# Altium PCB PCB_DMEM_Mezzanine.PcbDoc (part 4 of 4)
Units mil, origin at the board's own origin, x right, y up, seen from the top; angles counter-clockwise.
Board outline 2250 x 3200 mil, 6 copper layers (Top Layer - Signal, AGND-L1, Int. Signal, Power-GND, AGND-D.Sig., Bottom Layer - Signal), stack 32.112 mil thick; 443 components, 241 nets, 1099 pads, 545 vias.
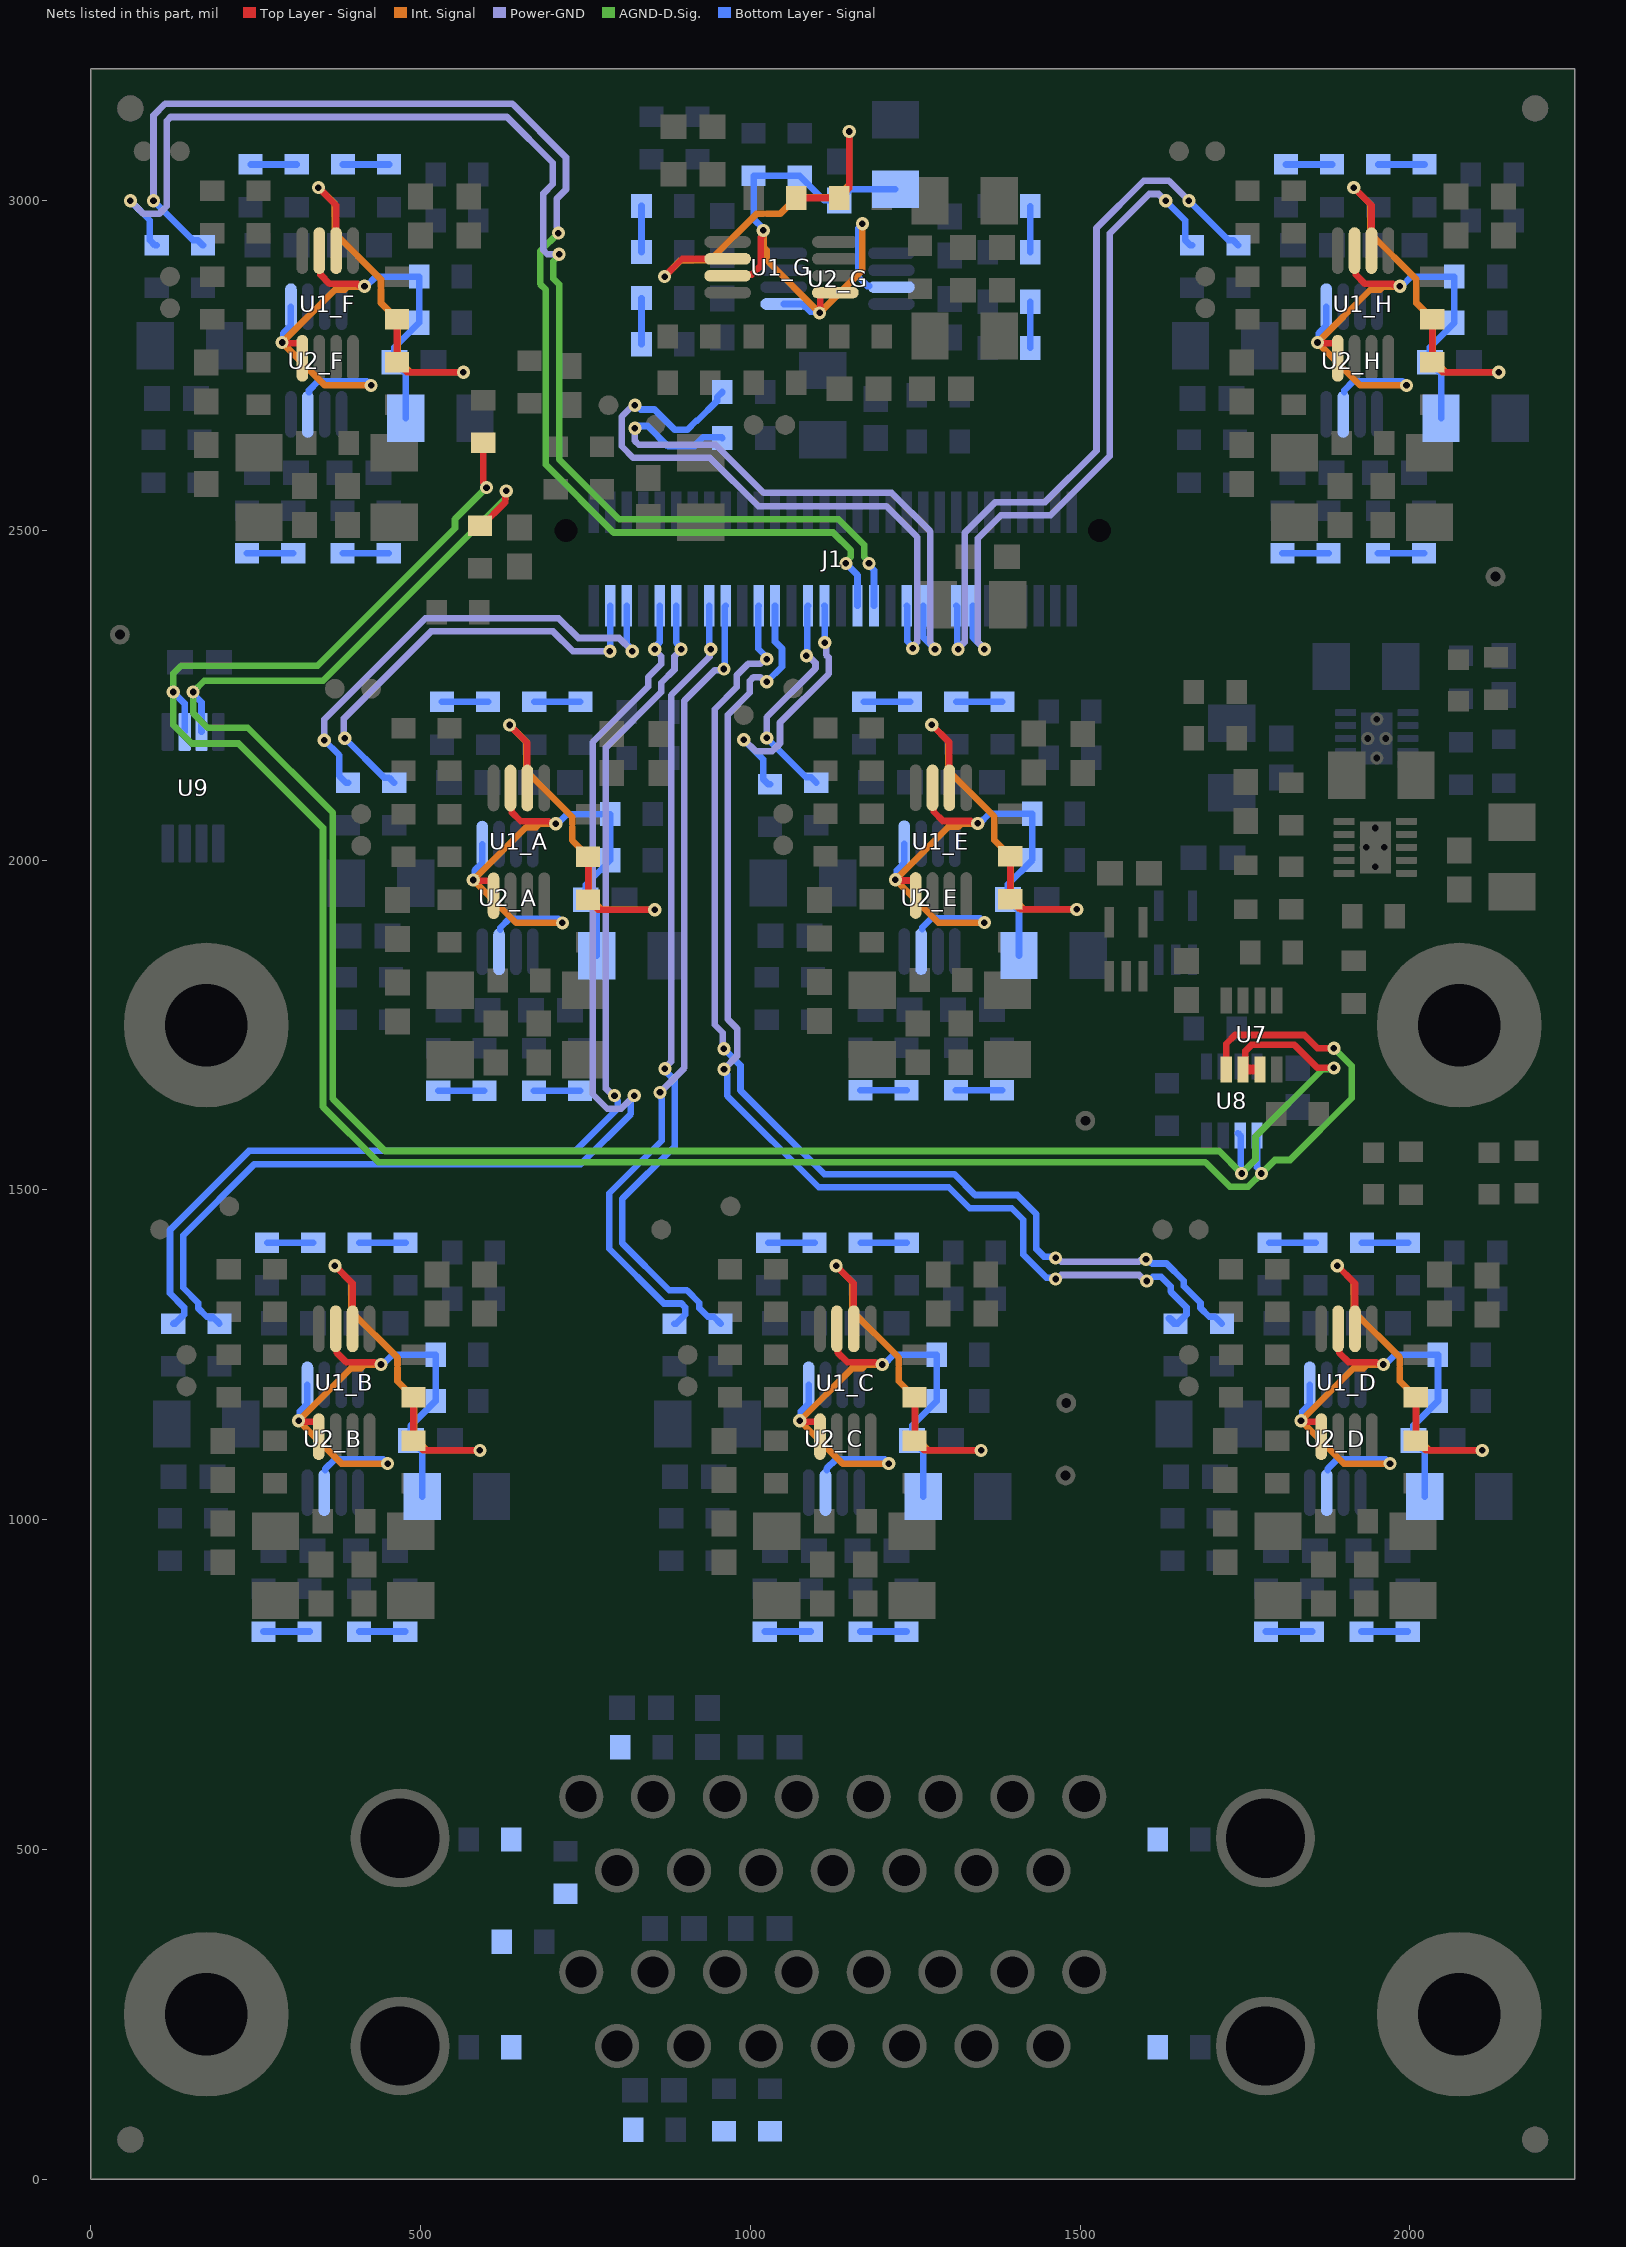
[diagram p8: the nets of this part, all layers, seen from the top]

## Via types
v1: diameter 20, hole 10, Top Layer - Signal to Bottom Layer - Signal, 545 vias

## Nets (pads, with @x,y where several pads share a name; then routed paths per layer and width w, separated by ;. In a path a pad name is that pad's centre, name@x,y a point inside that pad or via, vN(x,y) a via of type N, cw(c..) or ccw(c..) an arc to the next point about the centre after c; other vN are vias at no path point) (continued)
NetR11_A_2: R11_A.2 R14_A.1 U1_A.2 | length 692.1
  Top Layer - Signal w10: v1(635,2205) 661.89,2178.11 U1_A.2@661.89,2109.41 ; R14_A.1@754.09,2005.43 R11_A.2@754.09,1940 769.09,1925 v1(855,1925)
  Int. Signal w10: v1(635,2205) 660,2180 660,2135.71 730,2065.71 730,2055.18 ; 730,2050 730,2030 755,2005 755,1945 775,1925 v1(855,1925)
NetR11_B_2: R11_B.2 R14_B.1 U1_B.2 | length 692.1
  Top Layer - Signal w10: v1(370,1385) 396.89,1358.11 U1_B.2@396.89,1289.41 ; R14_B.1@489.09,1185.43 R11_B.2@489.09,1120 504.09,1105 v1(590,1105)
  Int. Signal w10: v1(370,1385) 395,1360 395,1315.71 465,1245.71 465,1235.18 ; 465,1230 465,1210 490,1185 490,1125 510,1105 v1(590,1105)
NetR11_C_2: R11_C.2 R14_C.1 U1_C.2 | length 692.1
  Top Layer - Signal w10: v1(1130,1385) 1156.89,1358.11 U1_C.2@1156.89,1289.41 ; R14_C.1@1249.09,1185.43 R11_C.2@1249.09,1120 1264.09,1105 v1(1350,1105)
  Int. Signal w10: v1(1130,1385) 1155,1360 1155,1315.71 1225,1245.71 1225,1235.18 ; 1225,1230 1225,1210 1250,1185 1250,1125 1270,1105 v1(1350,1105)
NetR11_D_2: R11_D.2 R14_D.1 U1_D.2 | length 692.1
  Top Layer - Signal w10: v1(1890,1385) 1916.89,1358.11 U1_D.2@1916.89,1289.41 ; R14_D.1@2009.09,1185.43 R11_D.2@2009.09,1120 2024.09,1105 v1(2110,1105)
  Int. Signal w10: v1(1890,1385) 1915,1360 1915,1315.71 1985,1245.71 1985,1235.18 ; 1985,1230 1985,1210 2010,1185 2010,1125 2030,1105 v1(2110,1105)
NetR11_E_2: R11_E.2 R14_E.1 U1_E.2 | length 697.3
  Top Layer - Signal w10: v1(1275,2205.47) 1301.89,2178.58 U1_E.2@1301.89,2109.88 ; R14_E.1@1394.09,2005.91 R11_E.2@1394.09,1940.47 1409.09,1925.47 v1(1495,1925.47)
  Int. Signal w10: v1(1275,2205.47) 1300,2180.47 1300,2136.18 1370,2066.18 1370,2030.47 1395,2005.47 1395,1945.47 1415,1925.47 v1(1495,1925.47)
NetR11_F_2: R11_F.2 R14_F.1 U1_F.2 | length 692.1
  Top Layer - Signal w10: v1(345,3020) 371.89,2993.11 U1_F.2@371.89,2924.41 ; R14_F.1@464.09,2820.43 R11_F.2@464.09,2755 479.09,2740 v1(565,2740)
  Int. Signal w10: v1(345,3020) 370,2995 370,2950.71 440,2880.71 440,2870.18 ; 440,2865 440,2845 465,2820 465,2760 485,2740 v1(565,2740)
NetR11_G_2: R11_G.2 R14_G.1 U1_G.2 | length 692.1
  Top Layer - Signal w10: v1(870,2885) 896.89,2911.89 U1_G.2@965.59,2911.89 ; R14_G.1@1069.57,3004.09 R11_G.2@1135,3004.09 1150,3019.09 v1(1150,3105)
  Int. Signal w10: v1(870,2885) 895,2910 939.29,2910 1009.29,2980 1019.82,2980 ; 1025,2980 1045,2980 1070,3005 1130,3005 1150,3025 v1(1150,3105)
NetR11_H_2: R11_H.2 R14_H.1 U1_H.2 | length 697.3
  Top Layer - Signal w10: v1(1915,3020) 1941.89,2993.11 U1_H.2@1941.89,2924.41 ; R14_H.1@2034.09,2820.43 R11_H.2@2034.09,2755 2049.09,2740 v1(2135,2740)
  Int. Signal w10: v1(1915,3020) 1940,2995 1940,2950.71 2010,2880.71 2010,2845 2035,2820 2035,2760 2055,2740 v1(2135,2740)
NetR17_A_2: R17_A.2 R18_A.1 | length 70
  Bottom Layer - Signal w10: R17_A.2@532.28,2240 R18_A.1@602.28,2240
NetR17_B_2: R17_B.2 R18_B.1 | length 70
  Bottom Layer - Signal w10: R17_B.2@267.28,1420 R18_B.1@337.28,1420
NetR17_C_2: R17_C.2 R18_C.1 | length 70
  Bottom Layer - Signal w10: R17_C.2@1027.28,1420 R18_C.1@1097.28,1420
NetR17_D_2: R17_D.2 R18_D.1 | length 70
  Bottom Layer - Signal w10: R17_D.2@1787.28,1420 R18_D.1@1857.28,1420
NetR17_E_2: R17_E.2 R18_E.1 | length 70
  Bottom Layer - Signal w10: R17_E.2@1172.28,2240.47 R18_E.1@1242.28,2240.47
NetR17_F_2: R17_F.2 R18_F.1 | length 70
  Bottom Layer - Signal w10: R17_F.2@242.28,3055 R18_F.1@312.28,3055
NetR17_G_2: R17_G.2 R18_G.1 | length 70
  Bottom Layer - Signal w10: R17_G.2@835,2782.28 R18_G.1@835,2852.28
NetR17_H_2: R17_H.2 R18_H.1 | length 70
  Bottom Layer - Signal w10: R17_H.2@1812.28,3055 R18_H.1@1882.28,3055
NetR19_A_2: R19_A.2 R20_A.1 | length 70
  Bottom Layer - Signal w10: R19_A.2@526.81,1650.43 R20_A.1@596.81,1650.43
NetR19_B_2: R19_B.2 R20_B.1 | length 70
  Bottom Layer - Signal w10: R19_B.2@261.81,830.43 R20_B.1@331.81,830.43
NetR19_C_2: R19_C.2 R20_C.1 | length 70
  Bottom Layer - Signal w10: R19_C.2@1021.81,830.43 R20_C.1@1091.81,830.43
NetR19_D_2: R19_D.2 R20_D.1 | length 70
  Bottom Layer - Signal w10: R19_D.2@1781.81,830.43 R20_D.1@1851.81,830.43
NetR19_E_2: R19_E.2 R20_E.1 | length 70
  Bottom Layer - Signal w10: R19_E.2@1166.81,1650.91 R20_E.1@1236.81,1650.91
NetR19_F_2: R19_F.2 R20_F.1 | length 70
  Bottom Layer - Signal w10: R19_F.2@236.81,2465.43 R20_F.1@306.81,2465.43
NetR19_G_2: R19_G.2 R20_G.1 | length 70
  Bottom Layer - Signal w10: R19_G.2@1424.57,2776.81 R20_G.1@1424.57,2846.81
NetR19_H_2: R19_H.2 R20_H.1 | length 70
  Bottom Layer - Signal w10: R19_H.2@1806.81,2465.43 R20_H.1@1876.81,2465.43
NetR21_A_2: R21_A.2 R22_A.1 | length 70
  Bottom Layer - Signal w10: R21_A.2@672.28,2240 R22_A.1@742.28,2240
NetR21_B_2: R21_B.2 R22_B.1 | length 70
  Bottom Layer - Signal w10: R21_B.2@407.28,1420 R22_B.1@477.28,1420
NetR21_C_2: R21_C.2 R22_C.1 | length 70
  Bottom Layer - Signal w10: R21_C.2@1167.28,1420 R22_C.1@1237.28,1420
NetR21_D_2: R21_D.2 R22_D.1 | length 70
  Bottom Layer - Signal w10: R21_D.2@1927.28,1420 R22_D.1@1997.28,1420
NetR21_E_2: R21_E.2 R22_E.1 | length 70
  Bottom Layer - Signal w10: R21_E.2@1312.28,2240.47 R22_E.1@1382.28,2240.47
NetR21_F_2: R21_F.2 R22_F.1 | length 70
  Bottom Layer - Signal w10: R21_F.2@382.28,3055 R22_F.1@452.28,3055
NetR21_G_2: R21_G.2 R22_G.1 | length 70
  Bottom Layer - Signal w10: R21_G.2@835,2922.28 R22_G.1@835,2992.28
NetR21_H_2: R21_H.2 R22_H.1 | length 70
  Bottom Layer - Signal w10: R21_H.2@1952.28,3055 R22_H.1@2022.28,3055
NetR23_A_2: R23_A.2 R24_A.1 | length 70
  Bottom Layer - Signal w10: R23_A.2@671.81,1650.43 R24_A.1@741.81,1650.43
NetR23_B_2: R23_B.2 R24_B.1 | length 70
  Bottom Layer - Signal w10: R23_B.2@406.81,830.43 R24_B.1@476.81,830.43
NetR23_C_2: R23_C.2 R24_C.1 | length 70
  Bottom Layer - Signal w10: R23_C.2@1166.81,830.43 R24_C.1@1236.81,830.43
NetR23_D_2: R23_D.2 R24_D.1 | length 70
  Bottom Layer - Signal w10: R23_D.2@1926.81,830.43 R24_D.1@1996.81,830.43
NetR23_E_2: R23_E.2 R24_E.1 | length 70
  Bottom Layer - Signal w10: R23_E.2@1311.81,1650.91 R24_E.1@1381.81,1650.91
NetR23_F_2: R23_F.2 R24_F.1 | length 70
  Bottom Layer - Signal w10: R23_F.2@381.81,2465.43 R24_F.1@451.81,2465.43
NetR23_G_2: R23_G.2 R24_G.1 | length 70
  Bottom Layer - Signal w10: R23_G.2@1424.57,2921.81 R24_G.1@1424.57,2991.81
NetR23_H_2: R23_H.2 R24_H.1 | length 70
  Bottom Layer - Signal w10: R23_H.2@1951.81,2465.43 R24_H.1@2021.81,2465.43
SCL: R54.1 U7.5 U8.5 U9.6 | length 3561.5
  Top Layer - Signal w10: R54.1@595,2632.72 595,2572.71 600,2567.71 v1(600,2565) ; U7.5@1720,1681.14 U7.5@1721.61,1682.75 1721.61,1721.61 1735,1735 1840,1735 1860,1715 v1(1885,1715)
  AGND-D.Sig. w10: v1(600,2565) 552.25,2517.25 552.25,2503.46 343.79,2295 136.86,2295 125,2283.14 v1(125,2255) 125,2205 153,2177 224,2177 352,2049 352,1626 436,1542 1690,1542 1727,1505 1755,1505 v1(1775,1525) 1795.44,1545.44 1818.44,1545.44 1912,1639 1912,1688 v1(1885,1715)
  Bottom Layer - Signal w10: v1(125,2255) 142.2,2237.8 U9.6@142.2,2194.65 ; U8.5@1768.39,1582.75 1768.39,1534.32 1775,1527.71 v1(1775,1525)
SDA: R48.1 U7.6 U7.7 U8.6 U9.7 | length 3407.4
  Top Layer - Signal w10: R48.1@590,2507.28 592.76,2507.28 628.09,2542.61 628.09,2558.09 v1(630,2560) ; U7.6@1747.2,1682.75 1750.7,1686.25 1750.7,1710.7 1760,1720 1825,1720 1860,1685 v1(1885,1685)
  Top Layer - Signal w15: U7.6@1747.2,1682.75 U7.7@1772.8,1682.75 U7.7@1773,1682.55
  AGND-D.Sig. w10: v1(630,2560) 628.09,2558.09 628.09,2548.09 352,2272 172,2272 v1(155,2255) 155,2223 177,2201 238,2201 367,2072 367,1638 446,1559 1711,1559 v1(1745,1525) 1766,1546 1766,1581 1868.09,1683.09 1883.09,1683.09 v1(1885,1685)
  Bottom Layer - Signal w10: v1(155,2255) 155,2252.29 167.8,2239.5 U9.7@167.8,2194.65 ; U8.6@1739.3,1586.25 U8.6@1742.8,1582.75 1743.9,1581.65 1743.9,1526.1 v1(1745,1525)
SHLD_GND: R29.2 R30.2 R31.2 R32.2 R33.2 R34.2 R37.1 R38.1 R39.1 R40.1
Vref_A: C5_A.2 C6_A.2 R1_A.1 R3_A.2 U1_A.3 U1_A.5 U2_A.3 U2_A.5 | length 977.2
  Top Layer - Signal w10: v1(580,1970) 581.2,1968.8 607.14,1968.8 610.71,1965.23 U1_A.5@610.71,1946.02 ; U1_A.3@636.3,2109.41 636.3,2102.85 638.03,2101.12 638.03,2072.95 652.01,2058.98 694.31,2058.98 696.02,2057.27 703.09,2057.27 v1(705,2055.35)
  Int. Signal w10: v1(705,2055.35) 704.65,2055 680,2055 675,2050 660,2050 v1(580,1970) 645,1905 v1(715,1905)
  Bottom Layer - Signal w10: v1(580,1970) 581.91,1971.91 581.91,1984.23 593.43,1995.75 U2_A.5@593.43,2024.41 ; U2_A.3@620.75,1894.79 620.75,1897.48 634.72,1911.46 708.54,1911.46 v1(715,1905) ; v1(705,2055.35) 707.71,2055.35 722.35,2070 R1_A.1@787.72,2070 R3_A.2@787.72,2000 750.47,1962.76 C6_A.2@750.47,1940 767.4,1923.07 C5_A.2@767.4,1855
Vref_B: C5_B.2 C6_B.2 R1_B.1 R3_B.2 U1_B.3 U1_B.5 U2_B.3 U2_B.5 | length 977.2
  Top Layer - Signal w10: v1(315,1150) 316.2,1148.8 342.14,1148.8 345.71,1145.23 U1_B.5@345.71,1126.02 ; U1_B.3@371.3,1289.41 371.3,1282.85 373.03,1281.12 373.03,1252.95 387.01,1238.98 429.31,1238.98 431.02,1237.27 438.09,1237.27 v1(440,1235.35)
  Int. Signal w10: v1(440,1235.35) 439.65,1235 415,1235 410,1230 395,1230 v1(315,1150) 380,1085 v1(450,1085)
  Bottom Layer - Signal w10: v1(315,1150) 316.91,1151.91 316.91,1164.23 328.43,1175.75 U2_B.5@328.43,1204.41 ; U2_B.3@355.75,1074.79 355.75,1077.48 369.72,1091.46 443.54,1091.46 v1(450,1085) ; v1(440,1235.35) 442.71,1235.35 457.35,1250 R1_B.1@522.72,1250 R3_B.2@522.72,1180 485.47,1142.76 C6_B.2@485.47,1120 502.4,1103.07 C5_B.2@502.4,1035
Vref_C: C5_C.2 C6_C.2 R1_C.1 R3_C.2 U1_C.3 U1_C.5 U2_C.3 U2_C.5 | length 977.2
  Top Layer - Signal w10: v1(1075,1150) 1076.2,1148.8 1102.14,1148.8 1105.71,1145.23 U1_C.5@1105.71,1126.02 ; U1_C.3@1131.3,1289.41 1131.3,1282.85 1133.03,1281.12 1133.03,1252.95 1147.01,1238.98 1189.31,1238.98 1191.02,1237.27 1198.09,1237.27 v1(1200,1235.35)
  Int. Signal w10: v1(1200,1235.35) 1199.65,1235 1175,1235 1170,1230 1155,1230 v1(1075,1150) 1140,1085 v1(1210,1085)
  Bottom Layer - Signal w10: v1(1075,1150) 1076.91,1151.91 1076.91,1164.23 1088.43,1175.75 U2_C.5@1088.43,1204.41 ; U2_C.3@1115.75,1074.79 1115.75,1077.48 1129.72,1091.46 1203.54,1091.46 v1(1210,1085) ; v1(1200,1235.35) 1202.71,1235.35 1217.35,1250 R1_C.1@1282.72,1250 R3_C.2@1282.72,1180 1245.47,1142.76 C6_C.2@1245.47,1120 1262.4,1103.07 C5_C.2@1262.4,1035
Vref_D: C5_D.2 C6_D.2 R1_D.1 R3_D.2 U1_D.3 U1_D.5 U2_D.3 U2_D.5 | length 977.2
  Top Layer - Signal w10: v1(1835,1150) 1836.2,1148.8 1862.14,1148.8 1865.71,1145.23 U1_D.5@1865.71,1126.02 ; U1_D.3@1891.3,1289.41 1891.3,1282.85 1893.03,1281.12 1893.03,1252.95 1907.01,1238.98 1949.31,1238.98 1951.02,1237.27 1958.09,1237.27 v1(1960,1235.35)
  Int. Signal w10: v1(1960,1235.35) 1959.65,1235 1935,1235 1930,1230 1915,1230 v1(1835,1150) 1900,1085 v1(1970,1085)
  Bottom Layer - Signal w10: v1(1835,1150) 1836.91,1151.91 1836.91,1164.23 1848.43,1175.75 U2_D.5@1848.43,1204.41 ; U2_D.3@1875.75,1074.79 1875.75,1077.48 1889.72,1091.46 1963.54,1091.46 v1(1970,1085) ; v1(1960,1235.35) 1962.71,1235.35 1977.35,1250 R1_D.1@2042.72,1250 R3_D.2@2042.72,1180 2005.47,1142.76 C6_D.2@2005.47,1120 2022.4,1103.07 C5_D.2@2022.4,1035
Vref_E: C5_E.2 C6_E.2 R1_E.1 R3_E.2 U1_E.3 U1_E.5 U2_E.3 U2_E.5 | length 977.2
  Top Layer - Signal w10: v1(1220,1970.47) 1221.2,1969.27 1247.14,1969.27 1250.71,1965.71 U1_E.5@1250.71,1946.5 ; U1_E.3@1276.3,2109.88 1276.3,2103.33 1278.03,2101.59 1278.03,2073.42 1292.01,2059.45 1334.31,2059.45 1336.02,2057.74 1343.09,2057.74 v1(1345,2055.83)
  Int. Signal w10: v1(1345,2055.83) 1344.65,2055.47 1320,2055.47 1315,2050.47 1300,2050.47 v1(1220,1970.47) 1285,1905.47 v1(1355,1905.47)
  Bottom Layer - Signal w10: v1(1220,1970.47) 1221.91,1972.39 1221.91,1984.71 1233.43,1996.22 U2_E.5@1233.43,2024.88 ; U2_E.3@1260.75,1895.26 1260.75,1897.95 1274.72,1911.93 1348.54,1911.93 v1(1355,1905.47) ; v1(1345,2055.83) 1347.71,2055.83 1362.35,2070.47 R1_E.1@1427.72,2070.47 R3_E.2@1427.72,2000.47 1390.47,1963.23 C6_E.2@1390.47,1940.47 1407.4,1923.54 C5_E.2@1407.4,1855.47
Vref_F: C5_F.2 C6_F.2 R1_F.1 R3_F.2 U1_F.3 U1_F.5 U2_F.3 U2_F.5 | length 977.2
  Top Layer - Signal w10: v1(290,2785) 291.2,2783.8 317.14,2783.8 320.71,2780.23 U1_F.5@320.71,2761.02 ; U1_F.3@346.3,2924.41 346.3,2917.85 348.03,2916.12 348.03,2887.95 362.01,2873.98 404.31,2873.98 406.02,2872.27 413.09,2872.27 v1(415,2870.35)
  Int. Signal w10: v1(415,2870.35) 414.65,2870 390,2870 385,2865 370,2865 v1(290,2785) 355,2720 v1(425,2720)
  Bottom Layer - Signal w10: v1(290,2785) 291.91,2786.91 291.91,2799.23 303.43,2810.75 U2_F.5@303.43,2839.41 ; U2_F.3@330.75,2709.79 330.75,2712.48 344.72,2726.46 418.54,2726.46 v1(425,2720) ; v1(415,2870.35) 417.71,2870.35 432.35,2885 R1_F.1@497.72,2885 R3_F.2@497.72,2815 460.47,2777.76 C6_F.2@460.47,2755 477.4,2738.07 C5_F.2@477.4,2670
Vref_G: C5_G.2 C6_G.2 R1_G.1 R3_G.2 U1_G.3 U1_G.5 U2_G.3 U2_G.5 | length 977.2
  Top Layer - Signal w10: U1_G.3@965.59,2886.3 972.15,2886.3 973.88,2888.03 1002.05,2888.03 1016.02,2902.01 1016.02,2944.31 1017.73,2946.02 1017.73,2953.09 v1(1019.65,2955) ; v1(1105,2830) 1106.2,2831.2 1106.2,2857.14 1109.77,2860.71 U1_G.5@1128.98,2860.71
  Int. Signal w10: v1(1019.65,2955) 1020,2954.65 1020,2930 1025,2925 1025,2910 v1(1105,2830) 1170,2895 v1(1170,2965)
  Bottom Layer - Signal w10: v1(1019.65,2955) 1019.65,2957.71 1005,2972.35 R1_G.1@1005,3037.72 R3_G.2@1075,3037.72 1112.24,3000.47 C6_G.2@1135,3000.47 1151.93,3017.4 C5_G.2@1220,3017.4 ; U2_G.5@1050.59,2843.43 1079.25,2843.43 1090.77,2831.91 1103.09,2831.91 v1(1105,2830) ; v1(1170,2965) 1163.54,2958.54 1163.54,2884.72 1177.52,2870.75 U2_G.3@1180.21,2870.75
Vref_H: C5_H.2 C6_H.2 R1_H.1 R3_H.2 U1_H.3 U1_H.5 U2_H.3 U2_H.5 | length 977.2
  Top Layer - Signal w10: v1(1860,2785) 1861.2,2783.8 1887.14,2783.8 1890.71,2780.23 U1_H.5@1890.71,2761.02 ; U1_H.3@1916.3,2924.41 1916.3,2917.85 1918.03,2916.12 1918.03,2887.95 1932.01,2873.98 1974.31,2873.98 1976.02,2872.27 1983.09,2872.27 v1(1985,2870.35)
  Int. Signal w10: v1(1985,2870.35) 1984.65,2870 1960,2870 1955,2865 1940,2865 v1(1860,2785) 1925,2720 v1(1995,2720)
  Bottom Layer - Signal w10: v1(1860,2785) 1861.91,2786.91 1861.91,2799.23 1873.43,2810.75 U2_H.5@1873.43,2839.41 ; U2_H.3@1900.75,2709.79 1900.75,2712.48 1914.72,2726.46 1988.54,2726.46 v1(1995,2720) ; v1(1985,2870.35) 1987.71,2870.35 2002.35,2885 R1_H.1@2067.72,2885 R3_H.2@2067.72,2815 2030.47,2777.76 C6_H.2@2030.47,2755 2047.4,2738.07 C5_H.2@2047.4,2670
W0_N: J1.5 R8_A.2 | length 736.4
  Power-GND w10: v1(354,2182) 354,2213.5 507.5,2367 709.28,2367 739.28,2337 801,2337 v1(821,2317)
  Bottom Layer - Signal w10: v1(354,2182) 376.69,2159.31 376.69,2127.83 387.24,2117.28 R8_A.2@390,2117.28 ; J1.5@812.5,2385.83 812.5,2328.21 821,2319.71 v1(821,2317)
W0_P: J1.3 R13_A.2 | length 672.9
  Power-GND w10: v1(385,2185) 383.79,2186.21 383.79,2215 515.79,2347 701,2347 731,2317 v1(787,2317)
  Bottom Layer - Signal w10: v1(385,2185) 444.67,2125.33 451.95,2125.33 R13_A.2@460,2117.28 ; v1(787,2317) 787.5,2317.5 J1.3@787.5,2385.83
W1_N: J1.11 R8_B.2 | length 1736.8
  Power-GND w10: v1(794,1643) 791.86,1643 781,1653.86 781,2170.86 865,2254.86 865,2269.07 885,2289.07 885,2309.14 v1@895,2319.14
  Bottom Layer - Signal w10: R8_B.2@126.28,1298.56 R8_B.2@125,1297.28 127.76,1297.28 141.45,1310.98 141.45,1321.98 120,1343.43 120,1439.28 239.86,1559.14 734.5,1559.14 799,1623.64 799,1635.29 794,1640.29 v1(794,1643) ; J1.11@887.5,2385.83 887.5,2330.21 895,2322.71 v1(895,2320)
W1_P: J1.9 R13_B.2 | length 1823.8
  Power-GND w10: v1(824,1643) 804,1623 783.01,1623 761,1645.01 761,2179.15 845,2263.15 845,2277.36 865,2297.36 865,2309.14 855,2319.14 v1(855,2320)
  Bottom Layer - Signal w10: R13_B.2@181.29,1305.33 R13_B.2@186.95,1305.33 ; R13_B.2@195,1297.28 184.45,1307.83 175.86,1307.83 162.65,1321.05 162.65,1329.07 140,1351.72 140,1431 248.14,1539.14 742.78,1539.14 819,1615.36 819,1635.29 824,1640.29 v1(824,1643) ; v1(855,2320) 855,2322.71 862.5,2330.21 J1.9@862.5,2385.83
W2_N: J1.17 R8_C.2 | length 1242.7
  Power-GND w10: v1(863,1648) 900,1685 900,2242.06 946.29,2288.35 958.35,2288.35 v1(960,2290)
  Bottom Layer - Signal w10: v1(863,1648) 864.91,1646.09 864.91,1639.02 865.57,1638.36 865.57,1574.67 786,1495.11 786,1410.72 868.88,1327.83 895.6,1327.83 901.45,1321.98 901.45,1310.98 887.76,1297.28 R8_C.2@885,1297.28 ; v1(960,2290) 961.25,2291.25 961.25,2384.58 J1.17@962.5,2385.83
W2_P: J1.15 R13_C.2 | length 1240
  Power-GND w10: v1(870.43,1683.72) 870.43,1685 880,1694.57 880,2250.35 938.09,2308.44 938.09,2318.09 v1(940,2320)
  Bottom Layer - Signal w10: v1(870.43,1683.72) 870.43,1681.01 885.57,1665.88 885.57,1566.39 806,1486.82 806,1419 877.17,1347.83 903.88,1347.83 922.65,1329.07 922.65,1321.05 935.86,1307.83 944.45,1307.83 R13_C.2@955,1297.28 ; J1.15@937.5,2385.83 937.5,2325.21 940,2322.71 v1(940,2320)
W3_N: J1.23 R8_D.2 | length 1753.2
  Power-GND w10: v1(960.14,1683.14) 980,1703 980,1744.64 966,1758.64 966,2220.72 999.14,2253.86 999.14,2271.88 1005,2277.74 1015.03,2277.74 1022.29,2270.47 v1(1025,2270.47) ; v1(1463,1365) 1465.71,1365 1471.71,1371 1589.58,1371 1598.58,1362 v1(1601,1362)
  Bottom Layer - Signal w10: v1(960.14,1683.14) 960.14,1680.44 965.07,1675.51 965.07,1642.64 1103.72,1504 1301,1504 1332.64,1472.36 1396.36,1472.36 1413.86,1454.86 1413.86,1402 1448.94,1366.91 1461.09,1366.91 v1(1463,1365) ; v1(1025,2270.47) 1048,2293.47 1048,2321 1037.5,2331.5 J1.23@1037.5,2385.83 ; v1(1601,1362) 1603.71,1362 1610.21,1368.5 1622.78,1368.5 1637.32,1353.96 1637.32,1346.11 1661.45,1321.98 1661.45,1310.98 1647.76,1297.28 R8_D.2@1645,1297.28 ; R8_D.2@1634.31,1305.33 1642.36,1297.28 R8_D.2@1645,1297.28 ; R8_D.2@1636.95,1305.33 R8_D.2@1645,1297.28
W3_P: J1.21 R13_D.2 | length 1721.7
  Power-GND w10: v1(960,1714) 958.09,1715.91 958.09,1738.27 946,1750.36 946,2229 979.14,2262.14 979.14,2280.16 996.72,2297.74 1015.03,2297.74 1022.29,2305 v1(1025,2305) ; v1(1463,1397) 1465.71,1397 1471.71,1391 1589.14,1391 1591.23,1393.09 1598.09,1393.09 v1(1600,1395)
  Bottom Layer - Signal w10: v1(960,1714) 985.07,1688.93 985.07,1650.93 1112,1524 1309.28,1524 1340.93,1492.36 1404.64,1492.36 1433.86,1463.14 1433.86,1410.28 1445.23,1398.91 1461.09,1398.91 v1(1463,1397) ; J1.21@1012.5,2385.83 1012,2385.33 1012,2320.71 1025,2307.71 v1(1025,2305) ; v1(1600,1395) 1602.71,1395 1609.21,1388.5 1631.07,1388.5 1657.32,1362.25 1657.32,1354.39 1682.65,1329.07 1682.65,1321.05 1695.86,1307.83 1704.45,1307.83 R13_D.2@1715,1297.28
W4_N: J1.29 R8_E.2 | length 394.7
  Power-GND w10: v1(990,2182.72) 990.87,2182.72 1008.11,2165.47 1033.28,2165.47 1045,2177.19 1045,2208.76 1118.82,2282.57 1118.82,2307.43 1114.91,2311.33 1114.91,2328.09 v1(1113,2330)
  Bottom Layer - Signal w10: v1(990,2182.72) 990,2182.36 1019.31,2153.05 1019.31,2123.05 1027.36,2115 R8_E.2@1030,2115 ; J1.29@1112.5,2385.83 1112.75,2385.58 1112.75,2330.25 v1(1113,2330)
W4_P: J1.27 R13_E.2 | length 342.5
  Power-GND w10: v1(1025,2185.47) 1025,2217.04 1098.82,2290.86 1098.82,2299.14 1092.96,2305 1092.71,2305 1087.71,2310 v1(1085,2310)
  Bottom Layer - Signal w10: v1(1025,2185.47) 1084.67,2125.81 1091.95,2125.81 R13_E.2@1100,2117.76 ; v1(1085,2310) 1086.25,2311.25 1086.25,2384.58 J1.27@1087.5,2385.83
W5_N: J1.35 R8_F.2 | length 1997.9
  AGND-D.Sig. w10: v1(710,2919) 710,2916.85 701.29,2908.14 701.29,2882.14 710,2873.43 710,2608 801,2517 1133.78,2517 1172.5,2478.28 1172.5,2460.21 1180,2452.71 v1(1180,2450)
  Power-GND w10: v1(60,3000) 80,2980 103.28,2980 115,2991.72 115,3121.14 120.86,3127 631,3127 700.5,3057.5 700.5,3025.28 686.29,3011.08 686.29,2924.86 692.15,2919 v1(710,2919)
  Bottom Layer - Signal w10: v1(60,3000) 60,2999.64 89.31,2970.33 89.31,2940.33 97.36,2932.28 R8_F.2@100,2932.28 ; v1(1180,2450) 1180,2447.29 1187.5,2439.79 J1.35@1187.5,2385.83
W5_P: J1.33 R13_F.2 | length 1997.8
  AGND-D.Sig. w10: v1(709,2951) 681.29,2923.29 681.29,2873.85 690,2865.15 690,2599.72 792.72,2497 1125.5,2497 1152.5,2470 1152.5,2460.21 1145,2452.71 v1(1145,2450)
  Power-GND w10: v1(95,3000) 95,3129.43 112.57,3147 639.28,3147 720.5,3065.78 720.5,3017 706.29,3002.79 706.29,2960.78 707.09,2959.98 707.09,2952.91 v1(709,2951)
  Bottom Layer - Signal w10: v1(95,3000) 154.67,2940.33 161.95,2940.33 R13_F.2@170,2932.28 ; v1(1145,2450) 1145,2449.82 1162.5,2432.32 J1.33@1162.5,2385.83
W6_N: J1.41 R8_G.2 | length 930.4
  Power-GND w10: v1(825,2655) 825,2635.86 830.86,2630 947.28,2630 1020.28,2557 1214.39,2557 1273.11,2498.28 1273.11,2329.6 1280,2322.71 v1(1280,2320)
  Bottom Layer - Signal w10: v1@825.86,2655.96 827.31,2655.96 829.78,2658.43 844.39,2658.43 875.32,2627.5 914.68,2627.5 928.45,2641.28 956.44,2641.28 R8_G.2@957.72,2640 ; J1.41@1262.5,2385.83 1262.5,2337.86 1280,2320.36 v1(1280,2320)
W6_P: J1.39 R13_G.2 | length 986.6
  Power-GND w10: v1(825,2690) 822.29,2690 805,2672.71 805,2627.57 822.57,2610 939,2610 1012,2537 1206.11,2537 1253.11,2490 1253.11,2330.81 1246.21,2323.92 v1(1246.21,2321.21)
  Bottom Layer - Signal w10: v1@830,2687.5 834.07,2683.43 854.75,2683.43 885.68,2652.5 904.32,2652.5 918.1,2666.28 919.66,2666.28 949.67,2696.29 949.67,2701.95 R13_G.2@957.72,2710 ; J1.39@1237.5,2385.83 1238,2385.33 1238,2332.13 1246.21,2323.92 v1(1246.21,2321.21)
W7_N: J1.47 R8_H.2 | length 1034.4
  Power-GND w10: v1(1355,2320) 1355,2320.86 1345,2330.86 1345,2488 1380,2523 1455.28,2523 1545,2612.72 1545,2950.36 1604.85,3010.21 1619.14,3010.21 1629.35,3000 v1(1630,3000)
  Bottom Layer - Signal w10: J1.47@1337.5,2385.83 1337.5,2337.86 1355,2320.36 v1(1355,2320) ; v1(1630,3000) 1630,2999.64 1659.31,2970.33 1659.31,2940.33 1667.36,2932.28 R8_H.2@1670,2932.28
W7_P: J1.45 R13_H.2 | length 1125.6
  Power-GND w10: v1(1315,2320) 1315,2320.86 1325,2330.86 1325,2496.28 1371.72,2543 1447,2543 1525,2621 1525,2958.64 1596.57,3030.21 1634.79,3030.21 v1(1665,3000)
  Bottom Layer - Signal w10: J1.45@1312.5,2385.83 1313.75,2384.58 1313.75,2321.25 v1(1315,2320) ; v1(1665,3000) 1724.67,2940.33 1731.95,2940.33 R13_H.2@1740,2932.28 R13_H.2@1737.28,2935
pads on no net: J1.6 J1.8 J1.10 J1.12 J1.MH1 J1.MH2 J2.7 J2.8 J2.15 J2.22 J2.23 J2.30 U3.5 U4.5 U9.3 U9.5

## Polygon pours and split planes (outlines as drawn)
AGND on Top Layer - Signal "AGND_L01_P046" (solid, pour order 46): 0,3200 0,0 2250,0 2250,3200
INN_5V on Top Layer - Signal "INN_5V_L01_P042" (solid, pour order 42): 1695,1955 1800,1955 1800,1895 1810,1885 1875,1885 1875,1750 1695,1750
+5V3A on Top Layer - Signal "+5V3A_L01_P043" (solid, pour order 43): 1360,2485 1360,2435 1335,2435 1335,2340 1495,2340 1605,2230 1750,2090 1750,1990 2250,1990 2250,2360 2240,2370 1735,2370 1620,2485
AGND on Bottom Layer - Signal "AGND_L06_P052" (solid, pour order 52): 0,3200 0,0 2250,0 2250,3200
SHLD_GND on Bottom Layer - Signal "SHLD_GND_L06_P045" (solid, pour order 45): 350,645 350,5 1895,5 1900,0 1900,650
+5V3A on Bottom Layer - Signal "+5V3A_L06_P041" (solid, pour order 41): 1660,2360 1755,2360 1755,2290 1815,2290 1815,2230 1925,2230 1925,2155 1920,2160 1660,2160
+5V3A on Bottom Layer - Signal "+5V3A_L06_P040" (solid, pour order 40): 1505,2565 1505,2495 1585,2495 1585,2390 1425,2390 1425,2565
GND on Bottom Layer - Signal "GND_L06_P047" (solid, pour order 47): 950,2560 950,2470 935,2455 935,2430 1035,2430 1030,2435 1030,2550 1020,2560 1005,2560
GND on AGND-D.Sig. "GND_L05_P053" (solid, pour order 53): 1041,2489 1043,2487 1043,2401 690,2401 627,2338 455,2338 350,2233 322,2233 322,2135 387,2070 381,2064 381,1647 455,1573 1398,1573 1398,1577 1497,1676 1497,1762 1500,1762 1535,1797 1535,1953 1733,1953 1757,1929 1757,1837 1788,1837 1818,1807 1818,1735 1823,1730 1900,1730 1900,1719 1997,1622 1997,1470 1873,1470 1853,1490 396,1490 299,1587 299,1839 284,1839 175,1948 55,1948 36,1967 38,1969 38,2349 65,2376 378,2376 444,2442 503,2442 503,2458 583,2538 583,2799 618,2834 756,2834 781,2809 781,2648 961,2648 1042,2567 1042,2487
AGND on AGND-D.Sig. "AGND_L05_P044" (solid, pour order 44): 0,3200 0,0 2250,0 2250,3200
INN_5V on Power-GND "INN_5V_L04_P051" (solid, pour order 51): 0,3200 0,0 2250,0 2250,3200
GND on Power-GND "GND_L04_P050" (solid, pour order 50): 1041,2489 1043,2487 1043,2401 690,2401 627,2338 455,2338 350,2233 322,2233 322,2135 387,2070 381,2064 381,1647 455,1573 1398,1573 1398,1577 1497,1676 1497,1762 1500,1762 1535,1797 1535,1953 1733,1953 1757,1929 1757,1837 1788,1837 1818,1807 1818,1735 1823,1730 1900,1730 1900,1719 1997,1622 1997,1470 1873,1470 1853,1490 396,1490 299,1587 299,1839 284,1839 175,1948 55,1948 36,1967 38,1969 38,2349 65,2376 378,2376 444,2442 503,2442 503,2458 583,2538 583,2799 618,2834 756,2834 781,2809 781,2648 961,2648 1042,2567 1042,2487
AGND on AGND-L1 "AGND_L02_P048" (solid, pour order 48): 0,3200 0,0 2250,0 2250,3200
AGND on Int. Signal "AGND_L03_P049" (solid, pour order 49): 0,3200 0,0 2250,0 2250,3200 2245,3200

## Silkscreen, mask and mechanical layers (free items; w line width, h text height)
Top Overlay:
  drawing of 84 lines, arcs and shapes, not listed
  text "GND" at 37,2399 h25 r90
  text "+5V3" at 1990,2375 h25
  text "+5V3" at 2040,2170 h30
  text "DAPHNE Mezzanine V1.0 - HD Style / Active Compensator" at 310,1900 h40 r90
  text "+CE" at 1412,1592 h25
  text "+CE" at 2095,1468 h30 r90
  text "+5V" at 1921,1464 h30 r90
  text "AGND" at 1433,1125 h25
  text "+5V" at 1434,1013 h25
  text "MILANO-BICOCCA" at 335,425 h20 r90
  text "Esteban Cristaldo Claudio Gotti" at 130,385 h35 r90
Bottom Overlay:
  lines w10: 77.24,2834.67 157.24,2834.67 167.24,2844.67 ; 97.24,1199.67 177.24,1199.67 187.24,1209.67 ; 122.24,2529.67 122.24,2534.67 142.24,2554.67 ; 142.24,894.67 142.24,899.67 162.24,919.67 ; 142.24,2974.67 192.24,2974.67 217.24,2949.67 227.24,2949.67 ; 162.24,1339.67 212.24,1339.67 237.24,1314.67 247.24,1314.67 ; 192.24,2529.67 192.24,2534.67 212.24,2554.67 212.24,2569.67 227.24,2584.67 ; 212.24,894.67 212.24,899.67 232.24,919.67 232.24,934.67 247.24,949.67 ; 360,2020 440,2020 450,2030 ; 405,1715 405,1720 425,1740 ; 425,2160 475,2160 500,2135 510,2135 ; 472.24,2574.67 492.24,2554.67 532.24,2554.67 ; 472.24,2929.67 482.24,2919.67 542.24,2919.67 ; 475,1715 475,1720 495,1740 495,1755 510,1770 ; 492.24,939.67 512.24,919.67 552.24,919.67 ; 492.24,1294.67 502.24,1284.67 562.24,1284.67 ; 755,1760 775,1740 815,1740 ; 755,2115 765,2105 825,2105 ; 862.24,1199.67 942.24,1199.67 952.24,1209.67 ; 890,2585 935,2585 955,2605 ; 907.24,894.67 907.24,899.67 927.24,919.67 ; 915,2675 915,2740 935,2760 ; 927.24,1339.67 977.24,1339.67 1002.24,1314.67 1012.24,1314.67 ; 960,3010 970,3020 970,3080 ; 977.24,894.67 977.24,899.67 997.24,919.67 997.24,934.67 1012.24,949.67 ; 1002.24,2019.67 1082.24,2019.67 1092.24,2029.67 ; 1047.24,1714.67 1047.24,1719.67 1067.24,1739.67 ; 1050,2680 1060,2670 1060,2605 ; 1067.24,2159.67 1117.24,2159.67 1142.24,2134.67 1152.24,2134.67 ; 1117.24,1714.67 1117.24,1719.67 1137.24,1739.67 1137.24,1754.67 1152.24,1769.67 ; 1257.24,939.67 1277.24,919.67 1317.24,919.67 ; 1257.24,1294.67 1267.24,1284.67 1327.24,1284.67 ; 1320,2760 1335,2745 1345,2745 1360,2730 1370,2730 ; 1320,3010 1335,3025 1335,3070 ; 1340,2680 1360,2660 ; 1397.24,1759.67 1417.24,1739.67 1457.24,1739.67 ; 1397.24,2114.67 1407.24,2104.67 1467.24,2104.67 ; 1622.24,1199.67 1702.24,1199.67 1712.24,1209.67 ; 1647.24,2834.67 1727.24,2834.67 1737.24,2844.67 ; 1667.24,894.67 1667.24,899.67 1687.24,919.67 ; 1687.24,1339.67 1737.24,1339.67 1762.24,1314.67 1772.24,1314.67 ; 1692.24,2529.67 1692.24,2534.67 1712.24,2554.67 ; 1712.24,2974.67 1762.24,2974.67 1787.24,2949.67 1797.24,2949.67 ; 1737.24,894.67 1737.24,899.67 1757.24,919.67 1757.24,934.67 1772.24,949.67 ; 1762.24,2529.67 1762.24,2534.67 1782.24,2554.67 1782.24,2569.67 1797.24,2584.67 ; 2017.24,939.67 2037.24,919.67 2077.24,919.67 ; 2017.24,1294.67 2027.24,1284.67 2087.24,1284.67 ; 2042.24,2574.67 2062.24,2554.67 2102.24,2554.67 ; 2042.24,2929.67 2052.24,2919.67 2112.24,2919.67 ; 2160,2875 2170,2865 2170,2845
Top Paste:
  lines w-80: -20,60 140,60 ; 2110,60 2270,60 ; 2110,3140 2270,3140
Bottom Paste:
  circle w40: c60,60 r20
  circle w40: c2190,60 r20
  circle w40: c60,3140 r20
  circle w40: c2190,3140 r20
Top Solder:
  circle w40: c2190,3140 r20
  circle w40: c60,3140 r20
  circle w40: c2190,60 r20
  circle w40: c60,60 r20
Bottom Solder:
  circle w40: c60,60 r20
  circle w40: c2190,60 r20
  circle w40: c60,3140 r20
  circle w40: c2190,3140 r20
Mechanical 1:
  the board outline again, w10
Mechanical 15:
  lines w10: 2260,0 2345,0 ; 2265,3000 2340,3000 ; 2265,3200 2340,3200 ; 2345,60 2365,0 ; 2345,3260 2365,3200 ; 2355,0 2375,0 ; 2355,3200 2375,3200 ; 2365,1219.09 2365,0 ; 2365,1780.91 2365,3000 ; 2365,2900 2365,3000 ; 2365,3300 2365,3200 ; 2385,60 2365,0 ; 2385,3260 2365,3200 ; 2365,3000 2385,2940 2365,3000 ; 2365,3000 2345,2940 2365,3000 ; 2355,3000 2375,3000 2355,3000
  text "200 (mil)" at 2508.96,2859.08 h60 r90
  text "3000 (mil)" at 2400.99,1229.09 h60 r90

## Dimensions
2260,0 to 1529.53,2500 on Mechanical 15
175,250 to 0,0 on Mechanical 15
175,1750 to 175,250 on Mechanical 15
0,0 to 2250,0 on Mechanical 15
175,250 to 2075,250 on Mechanical 15

## Text inside footprints (layer, text, board x,y; h text height)
U5: Top Overlay "*" at 1535.41,1801.5 h50 r90; Mechanical 13 "*" at 1535.41,1801.5 h50 r90
U6: Bottom Overlay "*" at 1679.59,1826.5 h50 r270; Mechanical 13 "*" at 1679.59,1826.5 h50 r270
U7: Top Overlay "*" at 1810.39,1809.75 h50 r270; Mechanical 13 "*" at 1765,1765 h50 r270
U8: Bottom Overlay "*" at 1679.61,1709.75 h50 r90; Mechanical 13 "*" at 1725,1665 h50 r90